# EAGLE board shield8routed1 (EAGLE 8.7.1)
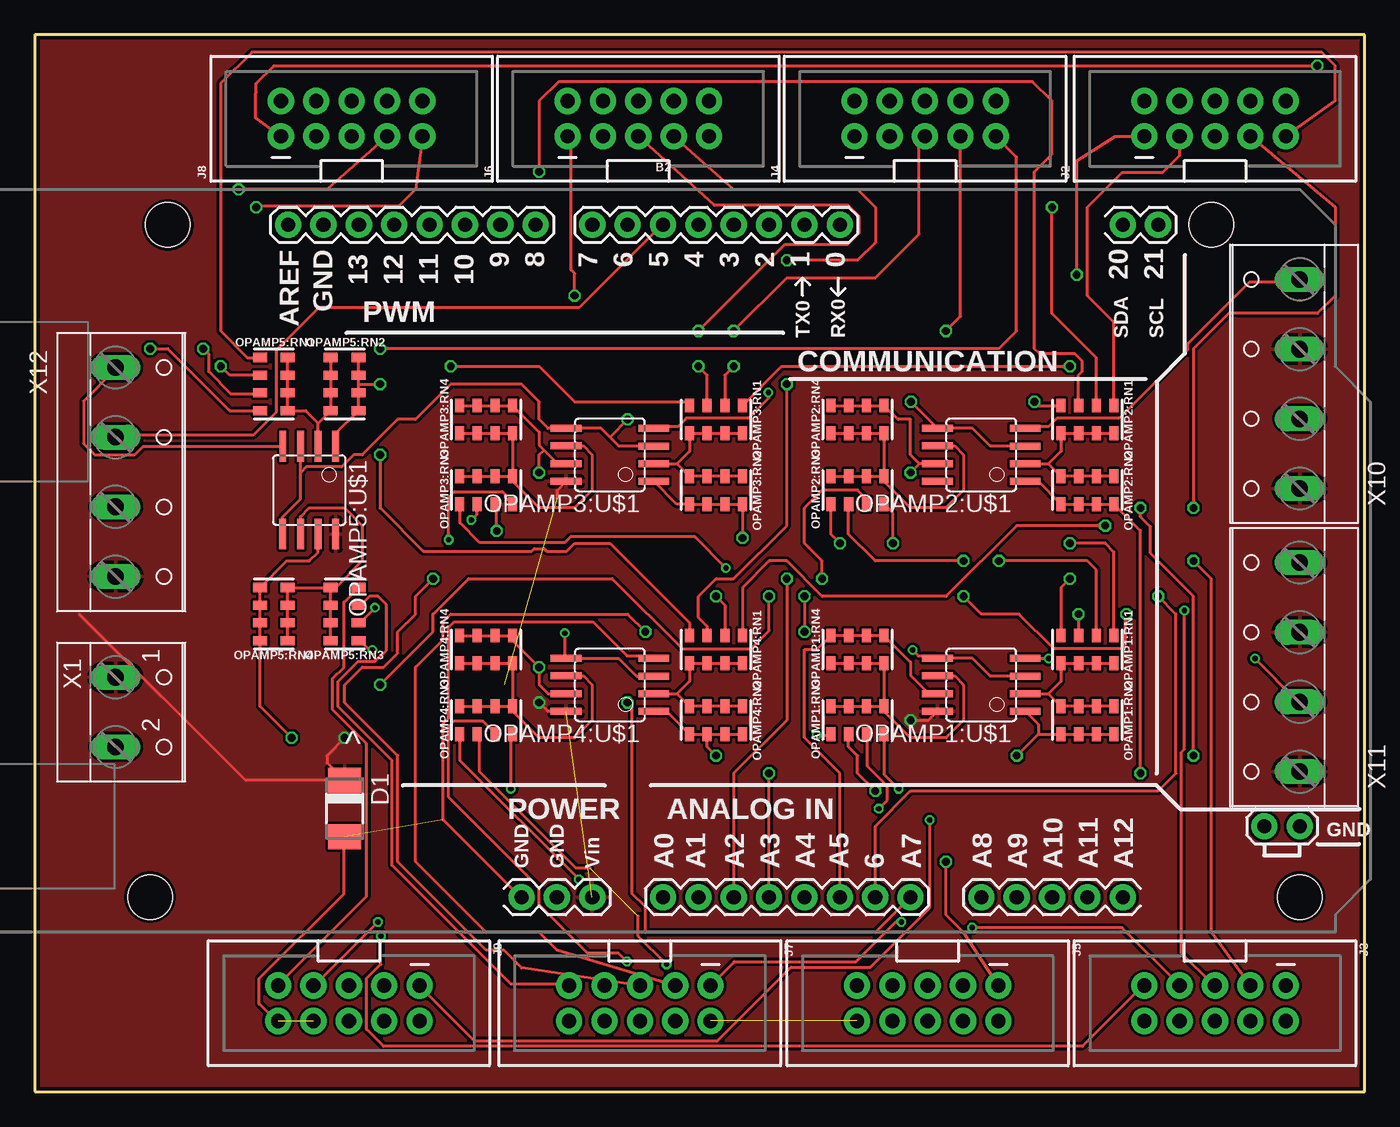
[diagram p0: board, top side]
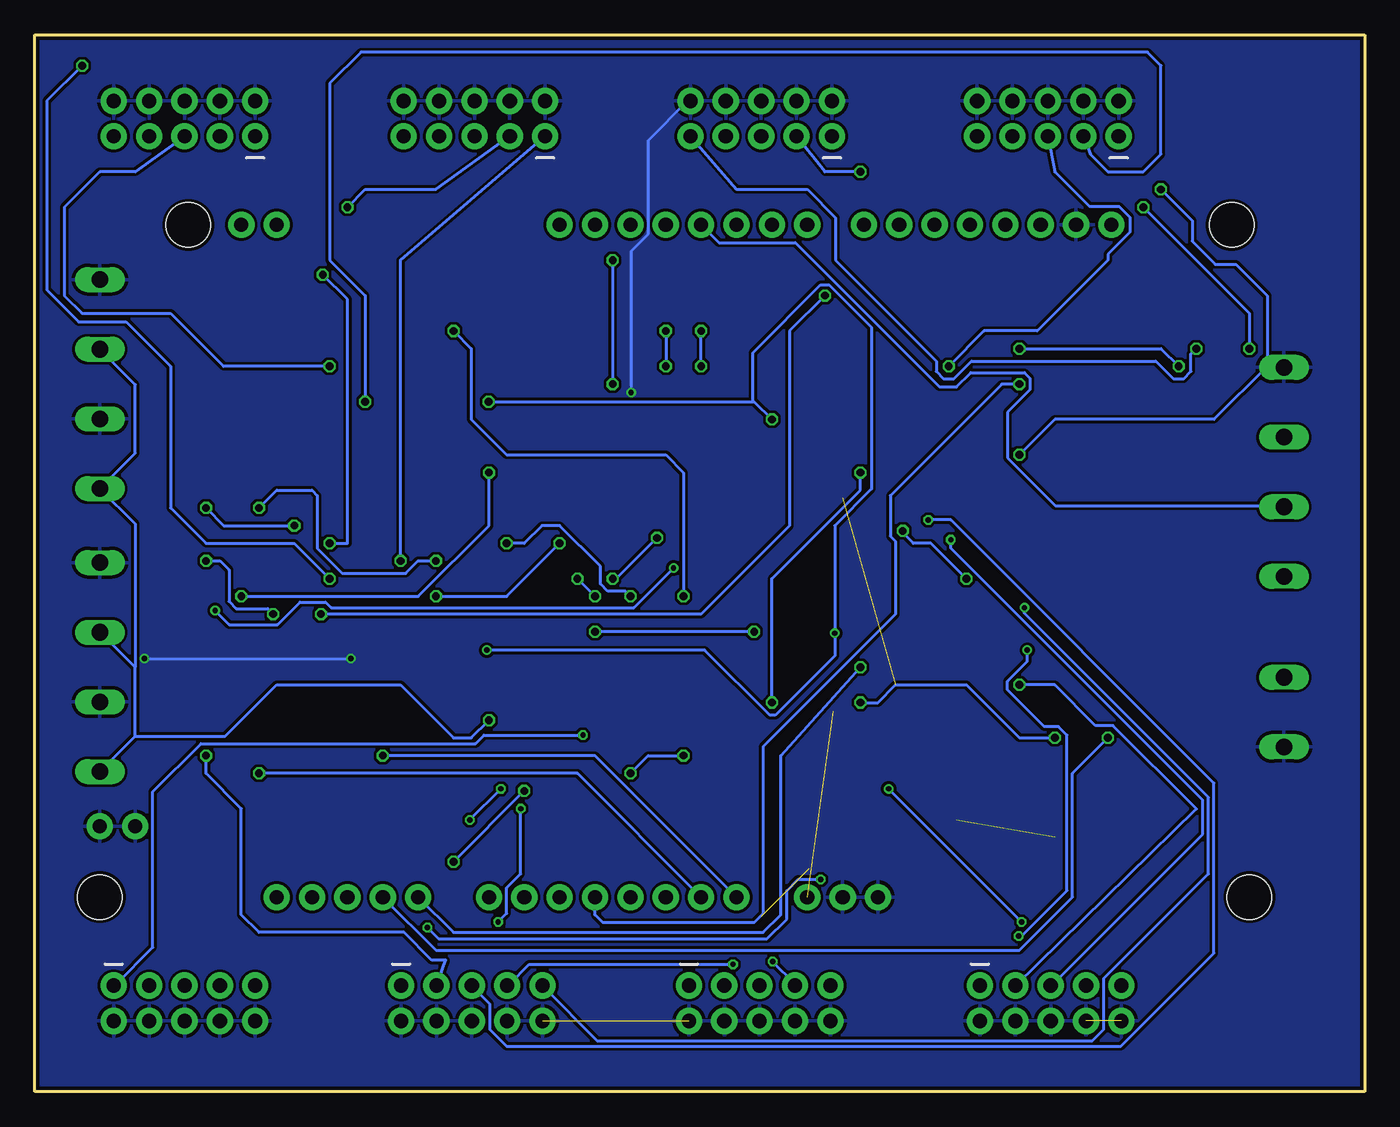
[diagram p1: board, bottom side, seen from below]

Size 95.5 x 75.87 mm. Coordinates in mm from the lower left corner, seen from the top.
Outline: 0,0 95.5,0 95.5,75.87 0,75.87 0,0
Copper layers (1*16): Top 0.035mm / dielectric 1.5mm / Bottom 0.035mm
Design rules "Dirty8TS": minimum track width 5mil, minimum drill 12mil, track to track 8mil, track to pad 8mil, pad to pad 8mil, via to via 8mil, smd to smd 0mil, copper to edge 10mil, drill to drill 10mil, minimum pad ring 10mil, minimum via ring 6mil, stop-mask expansion 2mil, vias tented up to drill 25mil, thermal gap 10mil
Net classes: 0 default: width 0.203 mm, drill 0.381 mm, clearance 0.203 mm

## Footprints (pad centres in the part's own frame; a part is rotated, then mirrored left to right if it is on the bottom)
ARDUINO_MEGA_EDIT = drill 1.016 pad 1.88: 0 13.97,24.13; 1 11.43,24.13; 2 8.89,24.13; 3 6.35,24.13; 4 3.81,24.13; 5 1.27,24.13; 6 -1.27,24.13; 7 -3.81,24.13; 8 -7.874,24.13; 9 -10.414,24.13; 10 -12.954,24.13; 11 -15.494,24.13; 12 -18.034,24.13; 13 -20.574,24.13; 20 34.29,24.13; 21 36.83,24.13; A0 1.27,-24.13; A1 3.81,-24.13; A2 6.35,-24.13; A3 8.89,-24.13; A4 11.43,-24.13; A5 13.97,-24.13; A6 16.51,-24.13; A7 19.05,-24.13; A8 24.13,-24.13; A9 26.67,-24.13; A10 29.21,-24.13; A11 31.75,-24.13; A12 34.29,-24.13; AREF -25.654,24.13; GND@0 -8.89,-24.13; GND@1 -6.35,-24.13; GND@2 44.45,-19.05; GND@3 46.99,-19.05; GND@4 -23.114,24.13; VIN -3.81,-24.13 | hole 3.2: -34.29,24.13; -35.56,-24.13; 40.64,24.13; 46.99,-24.13
DO-214AC = smd 1.8 x 2.4: A 2.025,0; C -2.025,0
2X5-SHROUDED = drill 1.016 pad 1.88: 1 -1.27,5.08; 2 1.27,5.08; 3 -1.27,2.54; 4 1.27,2.54; 5 -1.27,0; 6 1.27,0; 7 -1.27,-2.54; 8 1.27,-2.54; 9 -1.27,-5.08; 10 1.27,-5.08
0805-ARV_EDIT10K = smd 0.65 x 1: 1 -1.905,-1; 2 -0.635,-1; 3 0.635,-1; 4 1.905,-1; 5 1.905,1; 6 0.635,1; 7 -0.635,1; 8 -1.905,1
SOIC8 = smd 0.5 x 2.2: 1 -1.905,-3.154; 2 -0.645,-3.154; 3 0.625,-3.154; 4 1.895,-3.154; 5 1.905,3.154; 6 0.635,3.154; 7 -0.635,3.154; 8 -1.905,3.154
W237-102 = drill 1.194 long: 1 -2.5,-1.27; 2 2.5,-1.27
W237-4 = drill 1.194 long: 1 -7.5,-1.27; 2 -2.5,-1.27; 3 2.5,-1.27; 4 7.5,-1.27

## Placement (x,y rotation side)
B2  ARDUINO_MEGA_R3_EDIT  [ARDUINO_MEGA_EDIT]  43.84,38.1 0 top
D1  [DO-214AC]  22.25,20.32 270 top
J2  AVR_SPI_PROG_5X2_NEWPTH2  [2X5-SHROUDED]  84.75,69.85 90 top
J3  AVR_SPI_PROG_5X2_NEWPTH2  [2X5-SHROUDED]  84.75,6.35 270 top
J4  AVR_SPI_PROG_5X2_NEWPTH2  [2X5-SHROUDED]  63.93,69.85 90 top
J5  AVR_SPI_PROG_5X2_NEWPTH2  [2X5-SHROUDED]  64.12,6.35 270 top
J6  AVR_SPI_PROG_5X2_NEWPTH2  [2X5-SHROUDED]  43.34,69.85 90 top
J7  AVR_SPI_PROG_5X2_NEWPTH2  [2X5-SHROUDED]  43.45,6.35 270 top
J8  AVR_SPI_PROG_5X2_NEWPTH2  [2X5-SHROUDED]  22.75,69.85 90 top
J9  AVR_SPI_PROG_5X2_NEWPTH2  [2X5-SHROUDED]  22.55,6.35 270 top
OPAMP1:RN1  10k  [0805-ARV_EDIT10K]  75.59,31.75 180 top
OPAMP1:RN2  10k  [0805-ARV_EDIT10K]  75.59,26.67 180 top
OPAMP1:RN3  10k  [0805-ARV_EDIT10K]  59.08,26.67 0 top
OPAMP1:RN4  10k  [0805-ARV_EDIT10K]  59.08,31.75 0 top
OPAMP1:U$1  MCP6002SMT  [SOIC8]  67.97,29.21 90 top
OPAMP2:RN1  10k  [0805-ARV_EDIT10K]  75.59,48.26 180 top
OPAMP2:RN2  10k  [0805-ARV_EDIT10K]  75.59,43.18 180 top
OPAMP2:RN3  10k  [0805-ARV_EDIT10K]  59.08,43.18 0 top
OPAMP2:RN4  10k  [0805-ARV_EDIT10K]  59.08,48.26 0 top
OPAMP2:U$1  MCP6002SMT  [SOIC8]  67.97,45.72 90 top
OPAMP3:RN1  10k  [0805-ARV_EDIT10K]  48.92,48.26 180 top
OPAMP3:RN2  10k  [0805-ARV_EDIT10K]  48.92,43.18 180 top
OPAMP3:RN3  10k  [0805-ARV_EDIT10K]  32.41,43.18 0 top
OPAMP3:RN4  10k  [0805-ARV_EDIT10K]  32.41,48.26 0 top
OPAMP3:U$1  MCP6002SMT  [SOIC8]  41.3,45.72 90 top
OPAMP4:RN1  10k  [0805-ARV_EDIT10K]  48.92,31.75 180 top
OPAMP4:RN2  10k  [0805-ARV_EDIT10K]  48.92,26.67 180 top
OPAMP4:RN3  10k  [0805-ARV_EDIT10K]  32.41,26.67 0 top
OPAMP4:RN4  10k  [0805-ARV_EDIT10K]  32.41,31.75 0 top
OPAMP4:U$1  MCP6002SMT  [SOIC8]  41.3,29.21 90 top
OPAMP5:RN1  10k  [0805-ARV_EDIT10K]  17.17,50.8 270 top
OPAMP5:RN2  10k  [0805-ARV_EDIT10K]  22.25,50.8 270 top
OPAMP5:RN3  10k  [0805-ARV_EDIT10K]  22.25,34.29 90 top
OPAMP5:RN4  10k  [0805-ARV_EDIT10K]  17.17,34.29 90 top
OPAMP5:U$1  MCP6002SMT  [SOIC8]  19.71,43.18 180 top
X1  [W237-102]  7.07,27.25 270 top
X10  [W237-4]  89.56,50.8 90 top
X11  [W237-4]  89.56,30.48 90 top
X12  [W237-4]  7.07,44.49 270 top

## Library data of the parts
B2 = SparkFun-Boards
D1 = diode
J2-J9 = SparkFun-Connectors; PROD_ID: CONN-08671; SF_ID: PRT-08506
OPAMP1:RN1-OPAMP1:RN4 OPAMP2:RN1-OPAMP2:RN4 OPAMP3:RN1-OPAMP3:RN4 OPAMP4:RN1-OPAMP4:RN4 OPAMP5:RN1-OPAMP5:RN4 = SparkFun-Resistors
OPAMP1:U$1 OPAMP2:U$1 OPAMP3:U$1 OPAMP4:U$1 OPAMP5:U$1 = adam - ics
X1 = con-wago-500; MPN: 237-102; OC_FARNELL: unknown; OC_NEWARK: 70K9898
X10-X12 = con-wago-500; OC_FARNELL: unknown; OC_NEWARK: unknown

## Nets
+5V: B2.VIN D1.C OPAMP1:U$1.8 OPAMP3:U$1.8 OPAMP4:U$1.8 OPAMP5:U$1.8 X1.1 X10.1 X10.3 X11.1 X11.3 X12.4
A1O: B2.A0 OPAMP1:RN2.5 OPAMP1:RN2.6 OPAMP1:RN2.7 OPAMP1:RN2.8 OPAMP1:U$1.1
A2O: B2.A1 OPAMP2:RN2.5 OPAMP2:RN2.6 OPAMP2:RN2.7 OPAMP2:RN2.8 OPAMP2:U$1.1
A3O: B2.A2 OPAMP3:RN2.5 OPAMP3:RN2.6 OPAMP3:RN2.7 OPAMP3:RN2.8 OPAMP3:U$1.1
A4O: B2.A3 OPAMP4:RN2.5 OPAMP4:RN2.6 OPAMP4:RN2.7 OPAMP4:RN2.8 OPAMP4:U$1.1
A5O: B2.A4 OPAMP5:RN2.5 OPAMP5:RN2.6 OPAMP5:RN2.7 OPAMP5:RN2.8 OPAMP5:U$1.1
A6O: B2.A5 OPAMP1:RN4.5 OPAMP1:RN4.6 OPAMP1:RN4.7 OPAMP1:RN4.8 OPAMP1:U$1.7
A7O: B2.A6 OPAMP2:RN4.5 OPAMP2:RN4.6 OPAMP2:RN4.7 OPAMP2:RN4.8 OPAMP2:U$1.7
A8O: B2.A7 OPAMP3:RN4.5 OPAMP3:RN4.6 OPAMP3:RN4.7 OPAMP3:RN4.8 OPAMP3:U$1.7
A9O: B2.A8 OPAMP4:RN4.5 OPAMP4:RN4.6 OPAMP4:RN4.7 OPAMP4:RN4.8 OPAMP4:U$1.7
A10O: B2.A9 OPAMP5:RN4.5 OPAMP5:RN4.6 OPAMP5:RN4.7 OPAMP5:RN4.8 OPAMP5:U$1.7
CI: B2.4 X12.3
DI: B2.5 X12.2
GND: B2.GND@0 B2.GND@1 B2.GND@2 B2.GND@3 B2.GND@4 D1.A J2.2 J2.4 J2.6 J2.8 J2.10 J3.2 J3.4 J3.6 J3.8 J3.10 J4.2 J4.4 J4.6 J4.8 J4.10 J5.2 J5.4 J5.6 J5.8 J5.10 J6.2 J6.4 J6.6 J6.8 J6.10 J7.2 J7.4 J7.6 J7.8 J7.10 J8.2 J8.4 J8.6 J8.8 J8.10 J9.2 J9.4 J9.6 J9.8 J9.10 OPAMP1:U$1.4 OPAMP2:U$1.4 OPAMP3:U$1.4 OPAMP4:U$1.4 OPAMP5:U$1.4 X1.2 X10.2 X10.4 X11.2 X11.4 X12.1
OPAMP1:N$1: OPAMP1:RN3.5 OPAMP1:RN3.6 OPAMP1:RN3.7 OPAMP1:RN3.8 OPAMP1:RN4.1 OPAMP1:RN4.2 OPAMP1:RN4.3 OPAMP1:RN4.4 OPAMP1:U$1.6
OPAMP1:N$2: OPAMP1:RN1.5 OPAMP1:RN1.6 OPAMP1:RN1.7 OPAMP1:RN1.8 OPAMP1:RN2.1 OPAMP1:RN2.2 OPAMP1:RN2.3 OPAMP1:RN2.4 OPAMP1:U$1.2
OPAMP2:N$1: OPAMP2:RN3.5 OPAMP2:RN3.6 OPAMP2:RN3.7 OPAMP2:RN3.8 OPAMP2:RN4.1 OPAMP2:RN4.2 OPAMP2:RN4.3 OPAMP2:RN4.4 OPAMP2:U$1.6
OPAMP2:N$2: OPAMP2:RN1.5 OPAMP2:RN1.6 OPAMP2:RN1.7 OPAMP2:RN1.8 OPAMP2:RN2.1 OPAMP2:RN2.2 OPAMP2:RN2.3 OPAMP2:RN2.4 OPAMP2:U$1.2
OPAMP3:N$1: OPAMP3:RN3.5 OPAMP3:RN3.6 OPAMP3:RN3.7 OPAMP3:RN3.8 OPAMP3:RN4.1 OPAMP3:RN4.2 OPAMP3:RN4.3 OPAMP3:RN4.4 OPAMP3:U$1.6
OPAMP3:N$2: OPAMP3:RN1.5 OPAMP3:RN1.6 OPAMP3:RN1.7 OPAMP3:RN1.8 OPAMP3:RN2.1 OPAMP3:RN2.2 OPAMP3:RN2.3 OPAMP3:RN2.4 OPAMP3:U$1.2
OPAMP4:N$1: OPAMP4:RN3.5 OPAMP4:RN3.6 OPAMP4:RN3.7 OPAMP4:RN3.8 OPAMP4:RN4.1 OPAMP4:RN4.2 OPAMP4:RN4.3 OPAMP4:RN4.4 OPAMP4:U$1.6
OPAMP4:N$2: OPAMP4:RN1.5 OPAMP4:RN1.6 OPAMP4:RN1.7 OPAMP4:RN1.8 OPAMP4:RN2.1 OPAMP4:RN2.2 OPAMP4:RN2.3 OPAMP4:RN2.4 OPAMP4:U$1.2
OPAMP5:N$1: OPAMP5:RN3.5 OPAMP5:RN3.6 OPAMP5:RN3.7 OPAMP5:RN3.8 OPAMP5:RN4.1 OPAMP5:RN4.2 OPAMP5:RN4.3 OPAMP5:RN4.4 OPAMP5:U$1.6
OPAMP5:N$2: OPAMP5:RN1.5 OPAMP5:RN1.6 OPAMP5:RN1.7 OPAMP5:RN1.8 OPAMP5:RN2.1 OPAMP5:RN2.2 OPAMP5:RN2.3 OPAMP5:RN2.4 OPAMP5:U$1.2
S1A: J2.1 OPAMP1:RN1.1
S1B: J3.1 OPAMP1:RN3.1
S2A: J2.3 OPAMP2:RN1.1
S2B: J3.3 OPAMP2:RN3.1
S3A: J2.5 OPAMP3:RN1.1
S3B: J3.5 OPAMP3:RN3.1
S4A: J2.7 OPAMP4:RN1.1
S4B: J3.7 OPAMP4:RN3.1
S5A: J2.9 OPAMP5:RN1.1
S5B: J3.9 OPAMP5:RN3.1
S6A: J4.1 OPAMP1:RN1.2
S6B: J5.1 OPAMP1:RN3.2
S7A: J4.3 OPAMP2:RN1.2
S7B: J5.3 OPAMP2:RN3.2
S8A: J4.5 OPAMP3:RN1.2
S8B: J5.5 OPAMP3:RN3.2
S9A: J4.7 OPAMP4:RN1.2
S9B: J5.7 OPAMP4:RN3.2
S10A: J4.9 OPAMP5:RN1.2
S10B: J5.9 OPAMP5:RN3.2
S11A: J6.1 OPAMP1:RN1.3
S11B: J7.1 OPAMP1:RN3.3
S12A: J6.3 OPAMP2:RN1.3
S12B: J7.3 OPAMP2:RN3.3
S13A: J6.5 OPAMP3:RN1.3
S13B: J7.5 OPAMP3:RN3.3
S14A: J6.7 OPAMP4:RN1.3
S14B: J7.7 OPAMP4:RN3.3
S15A: J6.9 OPAMP5:RN1.3
S15B: J7.9 OPAMP5:RN3.3
S16A: J8.1 OPAMP1:RN1.4
S16B: J9.1 OPAMP1:RN3.4
S17A: J8.3 OPAMP2:RN1.4
S17B: J9.3 OPAMP2:RN3.4
S18A: J8.5 OPAMP3:RN1.4
S18B: J9.5 OPAMP3:RN3.4
S19A: J8.7 OPAMP4:RN1.4
S19B: J9.7 OPAMP4:RN3.4
S20A: J8.9 OPAMP5:RN1.4
S20B: J9.9 OPAMP5:RN3.4
VCC: OPAMP2:U$1.8
VREF: OPAMP1:U$1.3 OPAMP1:U$1.5 OPAMP2:U$1.3 OPAMP2:U$1.5 OPAMP3:U$1.3 OPAMP3:U$1.5 OPAMP4:U$1.3 OPAMP4:U$1.5 OPAMP5:U$1.3 OPAMP5:U$1.5

## Tracks (layer width: path | path; a pad name or v marks a point on that pad's centre or on a via)
+5V  (via drill 0.56)  (2 unrouted)
  Top 0.203: v62.89,26.67 64.18,26.67 OPAMP1:U$1.8 | OPAMP4:U$1.8 36.85,27.3 v36.22,27.94 | v22.25,25.4 20.98,24.13 20.98,23.61 D1.C 15.14,22.34 3.2,34.29 | OPAMP3:U$1.8 37.49,43.16 37.49,42.62
  Bottom 0.203: X10.3 88.29,50.76 88.29,45.84 X10.1 88.29,40.76 88.29,30.48 | X11.1 88.29,25.52 | 88.29,25.52 88.29,30.48 | 88.29,30.48 90.79,32.98 X11.3 | 88.29,25.52 81.82,25.52 78.13,29.21 69.24,29.21 65.43,25.4 64.16,25.4 v62.89,26.67 | v36.22,27.94 34.95,27.94 33.68,29.21 28.6,29.21 24.79,25.4 v22.25,25.4
  pour Top: 0,76 95.5,76 95.5,0 0,0
A1O  (via drill 0.56)
  Top 0.203: v70.51,24.13 72.05,25.67 | 72.05,25.67 OPAMP1:RN2.5 OPAMP1:RN2.6 OPAMP1:RN2.7 OPAMP1:RN2.8 | OPAMP1:U$1.1 72.05,26.38 72.05,25.67
  Bottom 0.203: B2.A0 55.27,24.13 v70.51,24.13
A2O  (via drill 0.56)
  Top 0.203: OPAMP2:U$1.1 72.05,43.81 OPAMP2:RN2.5 OPAMP2:RN2.6 OPAMP2:RN2.7 OPAMP2:RN2.8 79.4,40.27 v79.4,22.86
  Bottom 0.203: B2.A1 56.54,22.86 v79.4,22.86
A3O  (via drill 0.56)
  Top 0.203: OPAMP3:U$1.1 46.09,42.18 OPAMP3:RN2.5 OPAMP3:RN2.6 OPAMP3:RN2.7 OPAMP3:RN2.8 v50.83,39.75 | v54,36.83 54,26.67 50.19,22.86 B2.A2
  Bottom 0.203: v50.83,39.75 53.75,36.83 v54,36.83
A4O  (via drill 0.56)
  Top 0.203: OPAMP4:RN2.6 OPAMP4:RN2.5 45.38,27.3 OPAMP4:U$1.1 | OPAMP4:RN2.6 OPAMP4:RN2.7 OPAMP4:RN2.8 | B2.A3 v52.73,22.86 | v48.92,24.13 48.28,24.77 OPAMP4:RN2.6
  Bottom 0.203: v52.73,22.86 51.46,24.13 v48.92,24.13
A5O  (via drill 0.56)
  Top 0.203: 23.25,50.8 OPAMP5:RN2.6 OPAMP5:RN2.5 21.61,47.26 OPAMP5:U$1.1 | 23.25,50.8 OPAMP5:RN2.7 OPAMP5:RN2.8 | 23.25,50.8 v24.79,50.8
  Bottom 0.203: B2.A4 55.27,12.7 54.71,12.14 43.84,12.14 43.2,12.78 43.2,24.77 33.68,34.29 33.68,39.51 34.06,39.89 34.06,42.8 26.06,50.8 v24.79,50.8
A6O
  Top 0.203: OPAMP1:U$1.7 64.2,28.57 62.89,29.88 62.89,30.84 OPAMP1:RN4.5 OPAMP1:RN4.6 OPAMP1:RN4.7 OPAMP1:RN4.8 56.17,31.75 55.27,31.75 55.27,25.4 57.81,22.86 B2.A5
A7O  (via drill 0.56)
  Top 0.203: OPAMP2:RN4.8 OPAMP2:RN4.7 OPAMP2:RN4.6 OPAMP2:RN4.5 61.98,48.26 62.89,48.26 62.89,45.72 63.53,45.09 | OPAMP2:U$1.7 63.53,45.09 | B2.A6 60.35,19.05 62.89,21.59 80.67,21.59 81.94,22.86 81.94,34.29 v80.67,35.56 | v62.89,44.45 63.53,45.09
  Bottom 0.203: v80.67,35.56 67.97,35.56 62.89,40.64 v62.89,44.45
A8O  (via drill 0.56)
  Top 0.203: OPAMP3:RN4.8 OPAMP3:RN4.7 OPAMP3:RN4.6 OPAMP3:RN4.5 36.22,47.35 36.22,46.39 36.56,46.06 | 36.56,46.06 37.53,45.09 OPAMP3:U$1.7 | B2.A7 60.35,11.43 43.84,11.43 43.84,13.26 42.9,14.21 42.9,27.61 v42.57,27.94 | v36.22,44.45 36.22,45.72 36.56,46.06
  Bottom 0.203: v42.57,27.94 42.57,36.83 36.22,43.18 v36.22,44.45
A9O  (via drill 0.56)
  Top 0.203: OPAMP4:U$1.7 36.85,28.57 36.22,29.21 v36.22,30.48 34.31,32.38 OPAMP4:RN4.5 OPAMP4:RN4.6 OPAMP4:RN4.7 OPAMP4:RN4.8
  Bottom 0.203: B2.A8 65.43,11.43 43.2,11.43 41.94,12.7 41.94,24.13 v36.22,30.48
A10O  (via drill 0.56)
  Top 0.203: v18.44,25.4 16.17,27.67 OPAMP5:RN4.8 OPAMP5:RN4.7 OPAMP5:RN4.6 OPAMP5:RN4.5 18.07,38.1 19.71,38.1 20.34,38.73 OPAMP5:U$1.7
  Bottom 0.203: B2.A9 66.7,10.16 24.79,10.16 20.98,13.97 20.98,22.86 v18.44,25.4
CI
  Bottom 0.203: B2.4 46.38,60.96 40.89,60.96 30.53,50.6 29.31,50.6 28.3,51.61 24.43,51.61 24.03,51.21 24.03,50.39 25.65,48.77 25.65,45.52 22.2,42.06 5.94,42.06 X12.3
DI
  Top 0.203: X12.2 5.94,47.14 15.7,47.14 17.32,48.77 17.32,53.24 20.37,56.29 39.06,56.29 44.96,62.18 B2.5
GND  (via drill 0.38)  (3 unrouted)
  Top 0.203: OPAMP5:U$1.4 17.73,46.33 7.77,46.33 7.16,45.72 4.32,45.72 3.51,46.53 3.51,49.58 5.74,51.82 X12.1 | OPAMP4:U$1.4 44.35,31.29 42.52,31.29 40.08,33.73 30.12,33.73 29.72,33.33 29.72,26.82 29.31,26.42 29.31,19.51 34.8,14.02 B2.GND@0 | v52.68,50.19 52.68,49.78 51.26,48.36 46.79,48.36 46.18,47.75 44.55,47.75 OPAMP3:U$1.4 | v72.8,31.09 71.17,31.09 OPAMP1:U$1.4 | v87.63,31.09 90.68,28.04 X11.2 | OPAMP2:U$1.4 71.17,47.75 72.8,47.75 73.41,48.36 77.88,48.36 82.75,53.24 82.75,53.65 87.22,58.12 90.68,58.12 X10.4 | D1.A 22.2,18.29 22.2,14.22 16.1,8.13 16.1,6.3 17.32,5.08 J9.10
  Bottom 0.203: v52.68,50.19 52.68,60.35 51.46,61.57 51.46,68.28 48.62,71.12 J6.10 | v87.63,31.09 v72.8,31.09
  pour Bottom: 0,76 95.5,76 95.5,0 0,0
OPAMP1:N$1
  Top 0.203: OPAMP1:RN3.8 OPAMP1:RN3.7 OPAMP1:RN3.6 OPAMP1:RN3.5 | OPAMP1:RN4.1 OPAMP1:RN4.2 OPAMP1:RN4.3 OPAMP1:RN4.4 OPAMP1:RN3.5 | OPAMP1:U$1.6 66.06,29.84 66.7,29.21 66.7,26.67 65.43,25.4 62.89,25.4 60.98,27.3 OPAMP1:RN3.5
OPAMP1:N$2
  Top 0.203: OPAMP1:RN1.8 OPAMP1:RN1.7 OPAMP1:RN1.6 OPAMP1:RN1.5 73.69,29.46 72.79,28.57 | OPAMP1:RN2.1 OPAMP1:RN2.2 OPAMP1:RN2.3 OPAMP1:RN2.4 72.79,28.57 | OPAMP1:U$1.2 72.79,28.57
OPAMP2:N$1
  Top 0.203: OPAMP2:RN3.8 OPAMP2:RN3.7 OPAMP2:RN3.6 OPAMP2:RN3.5 | OPAMP2:RN4.1 OPAMP2:RN4.2 OPAMP2:RN4.3 OPAMP2:RN4.4 OPAMP2:RN3.5 | OPAMP2:U$1.6 66.06,46.35 66.7,45.72 66.7,43.18 65.43,41.91 62.89,41.91 60.98,43.81 OPAMP2:RN3.5
OPAMP2:N$2
  Top 0.203: OPAMP2:RN1.8 OPAMP2:RN1.7 OPAMP2:RN1.6 OPAMP2:RN1.5 73.69,45.97 72.79,45.08 | OPAMP2:RN2.1 OPAMP2:RN2.2 OPAMP2:RN2.3 OPAMP2:RN2.4 72.79,45.08 | OPAMP2:U$1.2 72.79,45.08
OPAMP3:N$1
  Top 0.203: OPAMP3:RN3.8 OPAMP3:RN3.7 OPAMP3:RN3.6 OPAMP3:RN3.5 | OPAMP3:RN4.1 OPAMP3:RN4.2 OPAMP3:RN4.3 OPAMP3:RN4.4 OPAMP3:RN3.5 | OPAMP3:U$1.6 39.4,46.35 40.03,45.72 40.03,43.18 38.76,41.91 36.22,41.91 34.31,43.81 OPAMP3:RN3.5
OPAMP3:N$2
  Top 0.203: OPAMP3:RN1.8 OPAMP3:RN1.7 OPAMP3:RN1.6 OPAMP3:RN1.5 47.02,45.97 46.12,45.08 | OPAMP3:RN2.1 OPAMP3:RN2.2 OPAMP3:RN2.3 OPAMP3:RN2.4 46.12,45.08 | OPAMP3:U$1.2 46.12,45.08
OPAMP4:N$1
  Top 0.203: OPAMP4:RN3.8 OPAMP4:RN3.7 OPAMP4:RN3.6 OPAMP4:RN3.5 | OPAMP4:RN4.1 OPAMP4:RN4.2 OPAMP4:RN4.3 OPAMP4:RN4.4 OPAMP4:RN3.5 | OPAMP4:U$1.6 39.4,29.84 40.03,29.21 40.03,26.67 38.76,25.4 36.22,25.4 34.31,27.3 OPAMP4:RN3.5
OPAMP4:N$2
  Top 0.203: OPAMP4:RN1.8 OPAMP4:RN1.7 OPAMP4:RN1.6 OPAMP4:RN1.5 47.02,29.46 46.12,28.57 | OPAMP4:RN2.1 OPAMP4:RN2.2 OPAMP4:RN2.3 OPAMP4:RN2.4 46.12,28.57 | OPAMP4:U$1.2 46.12,28.57
OPAMP5:N$1
  Top 0.203: OPAMP5:RN3.8 OPAMP5:RN3.7 OPAMP5:RN3.6 OPAMP5:RN3.5 | OPAMP5:RN4.1 OPAMP5:RN4.2 OPAMP5:RN4.3 OPAMP5:RN4.4 OPAMP5:RN3.5 | OPAMP5:U$1.6 19.07,41.27 19.71,41.91 22.25,41.91 23.52,40.64 23.52,38.1 21.61,36.2 OPAMP5:RN3.5
OPAMP5:N$2
  Top 0.203: OPAMP5:RN1.8 OPAMP5:RN1.7 OPAMP5:RN1.6 OPAMP5:RN1.5 19.46,48.9 20.36,48 | OPAMP5:RN2.1 OPAMP5:RN2.2 OPAMP5:RN2.3 OPAMP5:RN2.4 20.36,48 | OPAMP5:U$1.2 20.36,48
S1A  (via drill 0.56)
  Top 0.203: OPAMP1:RN1.1 77.5,38.73 76.86,39.37 v74.32,39.37 | J2.1 77.58,68.58 74.82,66.82 v74.82,58.65
  Bottom 0.203: v74.32,39.37 73.05,39.37 73.05,56.88 v74.82,58.65
S1B  (via drill 0.38)
  Top 0.203: v56.13,25.6 57.15,25.6 OPAMP1:RN3.1
  Bottom 0.203: v56.13,25.6 63.25,25.6 63.86,24.99 83.57,24.99 87.02,21.54 87.02,10.36 89.66,7.72 J3.1
S2A
  Top 0.203: J2.3 82.21,67.21 81,66 78.09,66 75.59,63.5 75.59,57.15 77.5,55.24 OPAMP2:RN1.1
S2B  (via drill 0.56)
  Top 0.203: J3.3 84.48,11.43 84.48,36.83 v83.21,38.1 | v66.7,35.56 67.97,34.29 70.67,34.29 73.17,31.79 78.01,31.79 78.28,32.06 78.28,34.18 v78.38,34.29 | v57.81,39.37 57.17,40.01 OPAMP2:RN3.1
  Bottom 0.203: v83.21,38.1 82.19,38.1 81.56,37.47 81.56,35.19 81.04,34.67 78.77,34.67 v78.38,34.29 | v66.7,35.56 61.62,35.56 v57.81,39.37
S3A  (via drill 0.56)
  Top 0.203: OPAMP3:RN1.1 53.63,52.07 v74.32,52.07
  Bottom 0.203: J2.5 88.29,66.04 90.83,66.04 93.37,63.5 93.37,57.15 92.1,55.88 85.75,55.88 81.94,52.07 v74.32,52.07
S3B  (via drill 0.38)
  Top 0.203: v49.63,37.59 47.4,39.83 38.45,39.83 38.05,39.42 31.95,39.42 30.53,40.84 30.53,42.06 OPAMP3:RN3.1 | v82.55,34.54 82.55,24.59 82.35,24.38 82.35,9.96 84.58,7.72 J3.5
  Bottom 0.203: v49.63,37.59 52.48,34.75 74.22,34.75 74.62,35.15 76.45,35.15 78.08,33.53 81.53,33.53 v82.55,34.54
S4A  (via drill 0.56)
  Top 0.203: J2.7 93.37,63.5 93.37,57.15 92.1,55.88 85.75,55.88 83.21,53.34 v83.21,41.91 | OPAMP4:RN1.1 50.83,36.2 52.73,38.1 54,38.1 56.54,35.56 65.43,35.56 70.51,40.64 v76.86,40.64
  Bottom 0.203: v83.21,41.91 81.94,40.64 v76.86,40.64
S4B  (via drill 0.38)
  Top 0.203: v39.06,15.24 30.53,23.77 30.53,25.6 OPAMP4:RN3.1 | v67.31,11.79 78.08,11.79 82.14,7.72 J3.7
  Bottom 0.203: v39.06,15.24 40.69,15.24 41.5,14.43 41.5,12.39 42.93,10.97 66.5,10.97 v67.31,11.79
S5A
  Top 0.203: J2.9 93.37,71.12 93.37,73.66 92.41,74.62 15.59,74.62 13.36,72.39 13.36,54.61 15.27,52.7 OPAMP5:RN1.1
S5B  (via drill 0.38)
  Top 0.203: v24.23,31.7 24.03,31.7 23.42,32.31 OPAMP5:RN3.1 | v24.84,11.18 24.84,9.14 23.83,8.13 23.83,4.47 25.04,3.25 75.23,3.25 79.5,7.52 J3.9
  Bottom 0.203: v24.23,31.7 24.23,30.89 25.65,29.46 25.65,28.85 23.01,26.21 22,26.21 21.39,25.6 21.39,14.43 24.64,11.18 v24.84,11.18
S6A  (via drill 0.56)
  Top 0.203: OPAMP1:RN1.2 76.22,37.47 75.59,38.1 v69.24,38.1
  Bottom 0.203: v69.24,38.1 69.24,59.69 J4.1
S6B  (via drill 0.56)
  Top 0.203: J5.1 66.7,11.43 65.43,12.7 v65.43,16.51 | OPAMP1:RN3.2 58.44,24.77 59.08,24.13 59.08,22.86 v60.35,21.59
  Bottom 0.203: v65.43,16.51 v60.35,21.59
S7A  (via drill 0.56)
  Top 0.203: OPAMP2:RN1.2 76.22,52.7 73.05,55.88 v73.05,63.5
  Bottom 0.203: v73.05,63.5 71.78,64.77 66.7,64.77 J4.3
S7B  (via drill 0.56)
  Top 0.203: v83.21,24.13 83.21,35.56 80.11,38.66 80.11,40.57 79.4,41.28 v79.4,41.91 | v66.7,38.1 60.35,38.1 58.44,40.01 OPAMP2:RN3.2
  Bottom 0.203: J5.3 65.99,9.45 67,9.45 68.98,11.43 79.4,11.43 80.67,12.7 80.67,20.32 83.21,22.86 v83.21,24.13 | v66.7,38.1 67.98,38.1 68.87,37.21 73.42,37.21 75.21,39 75.21,42.8 75.59,43.18 78.13,43.18 v79.4,41.91
S8A  (via drill 0.56)
  Top 0.203: v50.19,54.61 54,58.42 60.35,58.42 63.5,61.57 63.5,68.15 J4.5 | v50.19,52.07 49.55,51.44 OPAMP3:RN1.2
  Bottom 0.203: v50.19,54.61 v50.19,52.07
S8B  (via drill 0.38)
  Top 0.203: v31.34,41.05 31.75,41.45 31.75,42.06 OPAMP3:RN3.2
  Bottom 0.203: v31.34,41.05 29.72,41.05 10.82,22.15 10.82,9.96 17.53,3.25 61.62,3.25 62.84,4.47 62.84,6.3 64.06,7.52 J5.5
S9A  (via drill 0.56)
  Top 0.203: v48.92,35.56 49.55,34.92 OPAMP4:RN1.2 | v65.43,54.61 66.47,55.65 J4.7
  Bottom 0.203: v65.43,54.61 64.16,53.34 64.16,48.26 61.62,45.72 50.19,45.72 48.92,44.45 v48.92,35.56
S9B  (via drill 0.38)  (1 unrouted)
  Top 0.203: 39.88,16.05 38.86,16.05 31.95,22.96 31.95,25.6 OPAMP4:RN3.2 | 43.33,12.6 43.33,11.18 v45.36,9.14
  Bottom 0.203: v45.36,9.14 59.99,9.14 61.42,7.72 J5.7
S10A  (via drill 0.56)
  Top 0.203: v24.79,53.34 69.24,53.34 70.51,54.61 70.5,54.62 70.5,67.09 J4.9 | OPAMP5:RN1.2 14,51.44 v13.36,52.07
  Bottom 0.203: v24.79,53.34 14.63,53.34 v13.36,52.07
S10B  (via drill 0.38)
  Top 0.203: v24.43,34.75 23.42,33.73 OPAMP5:RN3.2
  Bottom 0.203: v24.43,34.75 24.43,34.34 11.23,21.13 11.23,15.65 18.75,8.13 18.75,4.47 19.56,3.66 55.12,3.66 58.98,7.52 J5.9
S11A  (via drill 0.56)
  Top 0.203: v74.95,34.29 OPAMP1:RN1.3 | v38.76,57.15 38.76,58.74 38.5,59 38.5,68.34 J6.1
  Bottom 0.203: v38.76,57.15 41.3,54.61 41.3,40.64 47.65,34.29 v74.95,34.29
S11B  (via drill 0.38)
  Top 0.203: v60.6,20.32 61.21,20.93 61.21,21.95 59.79,23.37 59.79,25.6 OPAMP1:RN3.3 | v62.23,12.19 61.82,12.19 58.98,9.35 50.24,9.35 48.62,7.72 J7.1
  Bottom 0.203: v60.6,20.32 60.6,15.65 61.62,14.63 61.62,12.8 v62.23,12.19
S12A  (via drill 0.56)
  Top 0.203: OPAMP2:RN1.3 74.95,51.45 75.21,51.7 75.21,52.44 74.69,52.96 72.16,52.96 71.78,53.34 71.78,66.04 73.05,67.31 73.05,71.12 71.65,72.52 37.62,72.52 36.22,71.12 v36.22,66.04
  Bottom 0.203: v36.22,66.04 38.76,66.04 J6.3
S12B  (via drill 0.56)
  Top 0.203: J7.3 37.49,10.16 36.22,11.43 32.41,11.43 27.33,16.51 27.33,30.48 29.31,32.46 29.31,33.73 29.87,34.29 42.57,34.29 v43.84,33.02 | OPAMP2:RN3.3 59.72,42.55 59.08,43.18 56.54,43.18 55.27,41.91 55.27,39.37 56.54,38.1 v56.54,36.83 | v55.27,35.56 v55.27,33.02
  Bottom 0.203: v43.84,33.02 v55.27,33.02 | v56.54,36.83 v55.27,35.56
S13A  (via drill 0.56)
  Top 0.203: OPAMP3:RN1.3 48.28,51.44 v47.65,52.07 | v47.65,54.61 53.87,60.83 58.39,60.83 59.21,61.65 59.21,62.81 58.39,63.63 48.79,63.63 J6.5
  Bottom 0.203: v47.65,52.07 v47.65,54.61
S13B  (via drill 0.56)
  Top 0.203: J7.5 34.95,8.89 33.68,10.16 32.41,10.16 26.06,16.51 26.06,24.13 22.25,27.94 22.25,29.21 23.52,30.48 25.05,30.48 26.06,31.49 26.06,33.02 27.33,34.29 27.33,35.56 v28.6,36.83 | v33.17,40.26 33.17,42.05 OPAMP3:RN3.3
  Bottom 0.203: v28.6,36.83 31.14,39.37 32.41,39.37 33.05,40.01 33.05,40.13 v33.17,40.26
S14A  (via drill 0.56)
  Top 0.203: J6.7 50.19,64.77 59.08,64.77 60.35,63.5 60.35,60.96 59.08,59.69 v54,59.69 | OPAMP4:RN1.3 48.28,33.4 47.65,34.04 47.65,35.56 48.92,36.83 50.19,36.83 54,40.64 v54,50.8
  Bottom 0.203: v54,59.69 v54,50.8
S14B  (via drill 0.38)
  Top 0.203: v42.52,9.35 41.91,9.96 39.67,9.96 36.22,13.41 36.22,14.63 29.72,21.13 29.72,26.21 30.12,26.62 32.16,26.62 32.97,25.81 OPAMP4:RN3.3
  Bottom 0.203: v42.52,9.35 40.89,7.72 J7.7
S15A  (via drill 0.56)
  Top 0.203: OPAMP5:RN1.3 15.78,50.16 15.73,50.11 14.06,50.11 12.47,51.7 12.47,52.96 v12.09,53.34
  Bottom 0.203: J6.9 45.11,64.77 40.03,64.77 38,62.74 38,59.69 30.76,52.45 30.76,51.7 30.24,51.18 29.5,51.18 28.23,52.45 15,52.45 13.73,51.18 12.99,51.18 12.47,51.7 12.47,52.96 v12.09,53.34
S15B
  Top 0.203: OPAMP5:RN3.3 23.42,34.95 24.03,35.56 24.64,35.56 25.25,34.95 25.25,31.7 24.43,30.89 23.22,30.89 21.79,29.46 21.79,27.64 25.65,23.77 25.65,16.26 34.19,7.72 38.25,7.72 J7.9
S16A  (via drill 0.56)
  Top 0.203: J8.1 15.85,69.9 15.85,71.67 15.9,71.72 15.9,72.39 17.17,73.66 v92.1,73.66 | v74.32,36.83 73.69,36.2 OPAMP1:RN1.4
  Bottom 0.203: v92.1,73.66 94.64,71.12 94.64,57.56 92.35,55.27 88.95,55.27 85.75,52.07 85.75,41.91 83.21,39.37 76.86,39.37 v74.32,36.83
S16B  (via drill 0.38)
  Top 0.203: v62.03,21.74 61.01,22.76 61.01,25.6 OPAMP1:RN3.4 | v64.26,19.51 64.26,13.21 59.99,8.94 54.3,8.94 49.02,3.66 31.55,3.66 27.69,7.52 J9.1
  Bottom 0.203: v64.26,19.51 v62.03,21.74
S17A  (via drill 0.56)
  Top 0.203: v71.78,49.53 72.05,49.26 OPAMP2:RN1.4
  Bottom 0.203: J8.3 19.71,67.31 18.44,66.04 15.9,66.04 14.63,67.31 14.63,73.66 15.59,74.62 72.08,74.62 74.32,72.39 74.32,59.69 71.78,57.15 v71.78,49.53
S17B  (via drill 0.56)
  Top 0.203: v24.79,29.21 28.6,33.02 28.6,34.29 31.14,36.83 41.46,36.83 46.5,31.79 51.42,31.79 | 51.42,31.79 51.46,31.75 | 51.42,31.79 52.73,33.11 v52.73,35.56 | v61.62,39.37 61.62,41.55 OPAMP2:RN3.4
  Bottom 0.203: J9.3 12.09,20.31 18.07,26.29 19.33,26.29 22.25,29.21 v24.79,29.21 | v52.73,35.56 53.11,35.94 54.37,35.94 54.89,36.46 54.89,37.72 57.81,40.64 59.08,40.64 60.35,39.37 v61.62,39.37
S18A  (via drill 0.56)
  Top 0.203: OPAMP3:RN1.4 46.74,49.53 38.76,49.53 36.22,52.07 v29.87,52.07
  Bottom 0.203: J8.5 22.25,66.04 19.76,63.55 17.64,63.55 16.86,62.78 16.86,61.68 18.44,60.11 18.44,59.69 23.52,54.61 27.33,54.61 v29.87,52.07
S18B  (via drill 0.38)
  Top 0.203: v29.72,39.62 29.72,42.67 30.12,43.08 33.58,43.08 33.78,42.88 33.78,42.67 34.19,42.27 OPAMP3:RN3.4
  Bottom 0.203: v29.72,39.62 29.72,39.01 11.63,20.93 11.63,18.49 22.4,7.72 J9.5
S19A  (via drill 0.56)
  Top 0.203: J8.7 20.98,64.77 v14.63,64.77 | OPAMP4:RN1.4 47.02,33.66 41.3,39.37 38.76,39.37 38.2,38.81 36.77,38.81 36.59,38.99 35.85,38.99 35.67,38.81 27.89,38.81 24.79,41.91 v24.79,45.72
  Bottom 0.203: v14.63,64.77 12.39,62.53 12.39,61.05 10.73,59.38 9.25,59.38 7.01,57.15 7.01,52.07 10.82,48.26 22.25,48.26 v24.79,45.72
S19B  (via drill 0.38)
  Top 0.203: v34.19,21.74 34.19,25.6 OPAMP4:RN3.4 | v24.64,12.19 20.17,7.72 J9.7
  Bottom 0.203: v24.64,12.19 v34.19,21.74
S20A  (via drill 0.56)
  Top 0.203: J8.9 27.33,64.77 26.11,63.55 15.95,63.55 v15.9,63.5 | v8.28,53.34 9.55,53.34 14,48.9 OPAMP5:RN1.4
  Bottom 0.203: v15.9,63.5 8.28,55.88 v8.28,53.34
S20B
  Top 0.203: OPAMP5:RN3.4 23.22,36.17 22.2,35.15 22.2,30.48 21.39,29.67 21.39,27.43 23.83,24.99 23.83,14.02 17.53,7.72 J9.9
VREF  (via drill 0.38, 0.56)
  Top 0.203: OPAMP3:U$1.3 41.95,46.34 41.3,46.99 | 41.3,46.99 40.66,47.62 OPAMP3:U$1.5 36.85,47.62 36.22,48.26 36.22,49.53 34.95,50.8 29.87,50.8 27.33,48.26 26.06,48.26 23.52,45.72 22.89,45.72 22.02,44.85 19.49,44.85 19.09,44.45 | OPAMP2:U$1.3 68.61,46.34 67.33,47.62 OPAMP2:U$1.5 v62.91,49.53 62.89,49.53 | v42.57,48.26 41.3,46.99 | OPAMP1:U$1.3 68.61,29.84 67.33,31.11 OPAMP1:U$1.5 64.67,31.29 63.45,31.29 v63.04,31.7 | OPAMP4:U$1.3 43.22,29.84 41.94,31.11 OPAMP4:U$1.5 38.05,31.29 v38.05,32.92 | OPAMP5:U$1.5 17.8,41.27 19.09,42.55 19.09,44.45 | 19.09,44.45 OPAMP5:U$1.3
  Bottom 0.203: v62.91,49.53 43.94,49.53 | 43.94,49.53 43.84,49.53 v42.57,48.26 | 43.94,49.53 43.94,53.03 39.06,57.91 38.45,57.91 35.41,54.86 35.41,43.28 38.05,40.64 v38.05,32.92 38.05,31.29 42.32,27.03 42.72,27.03 47.4,31.7 v63.04,31.7

## Text on the board
tPlace: ^